# Altium PCB PCB1.PcbDoc
Units mil, origin at the board's own origin, x right, y up, seen from the top; angles counter-clockwise.
Board outline 4439.14 x 4603.27 mil, 2 copper layers (Top Layer, Bottom Layer); 96 components, 122 nets, 402 pads, 72 vias.
Unrouted connection lines stored in the file: 1.
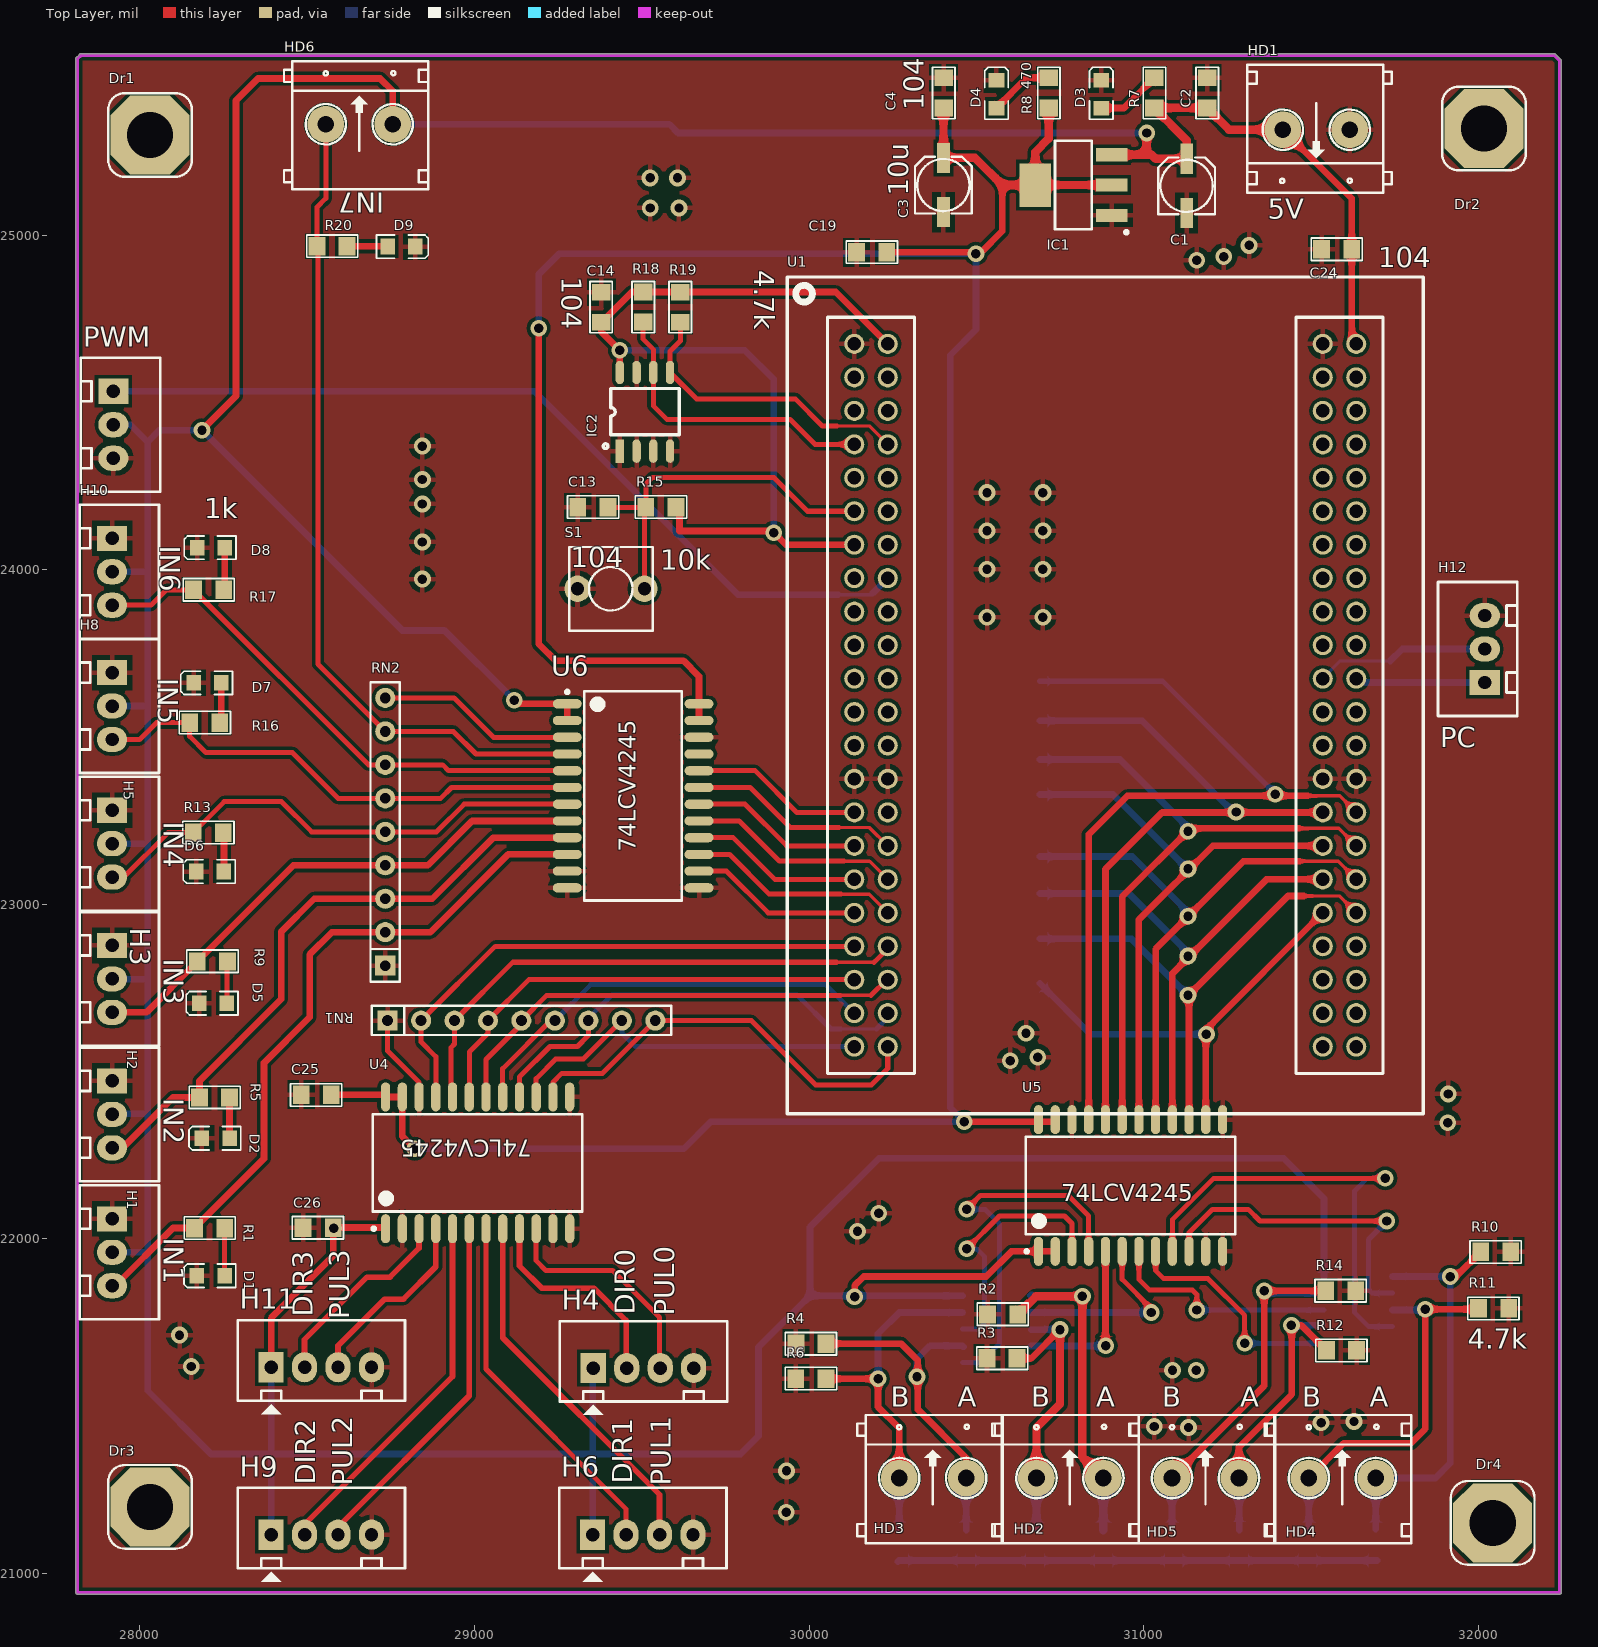
[diagram p0: Top Layer view]
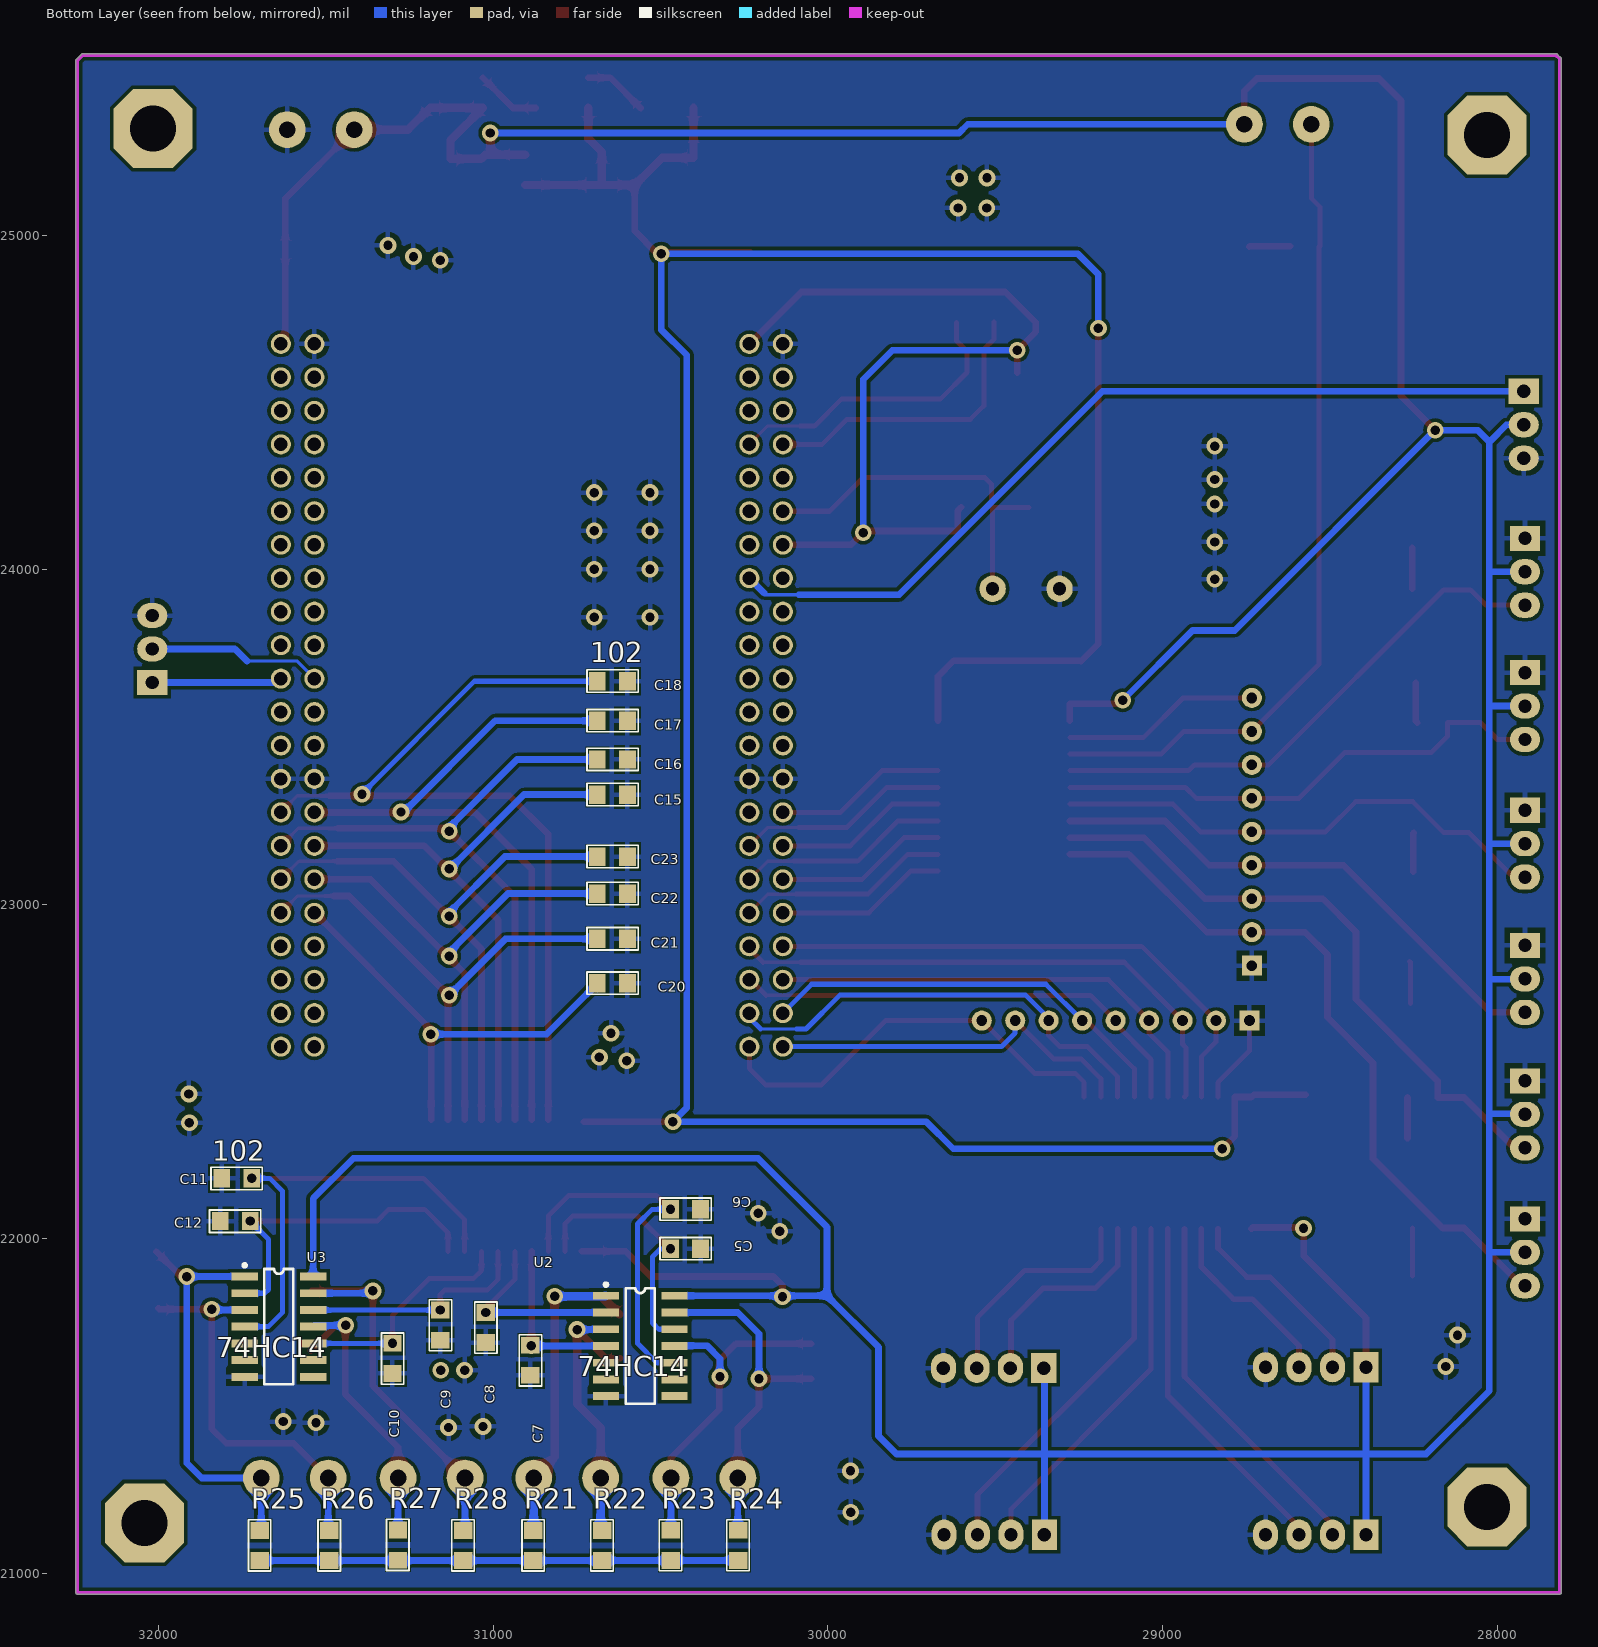
[diagram p1: Bottom Layer view, seen from below]
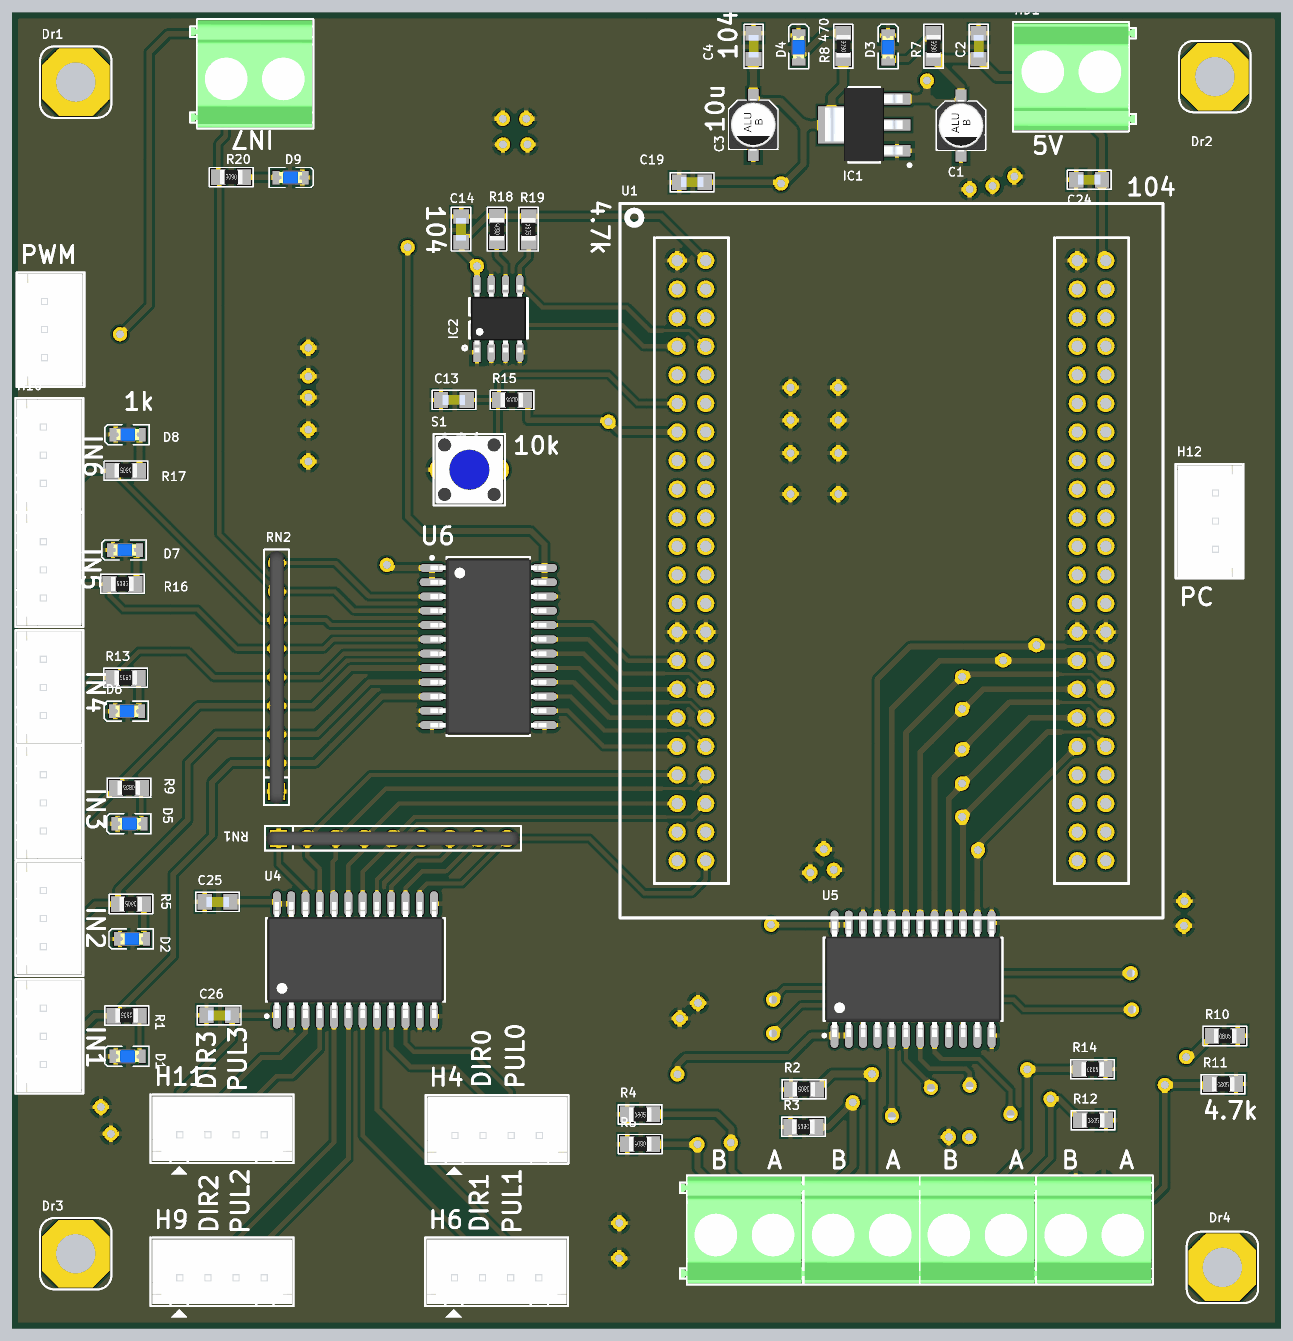
[diagram p2: 3D render of the assembled board from above, using the file's embedded part models]
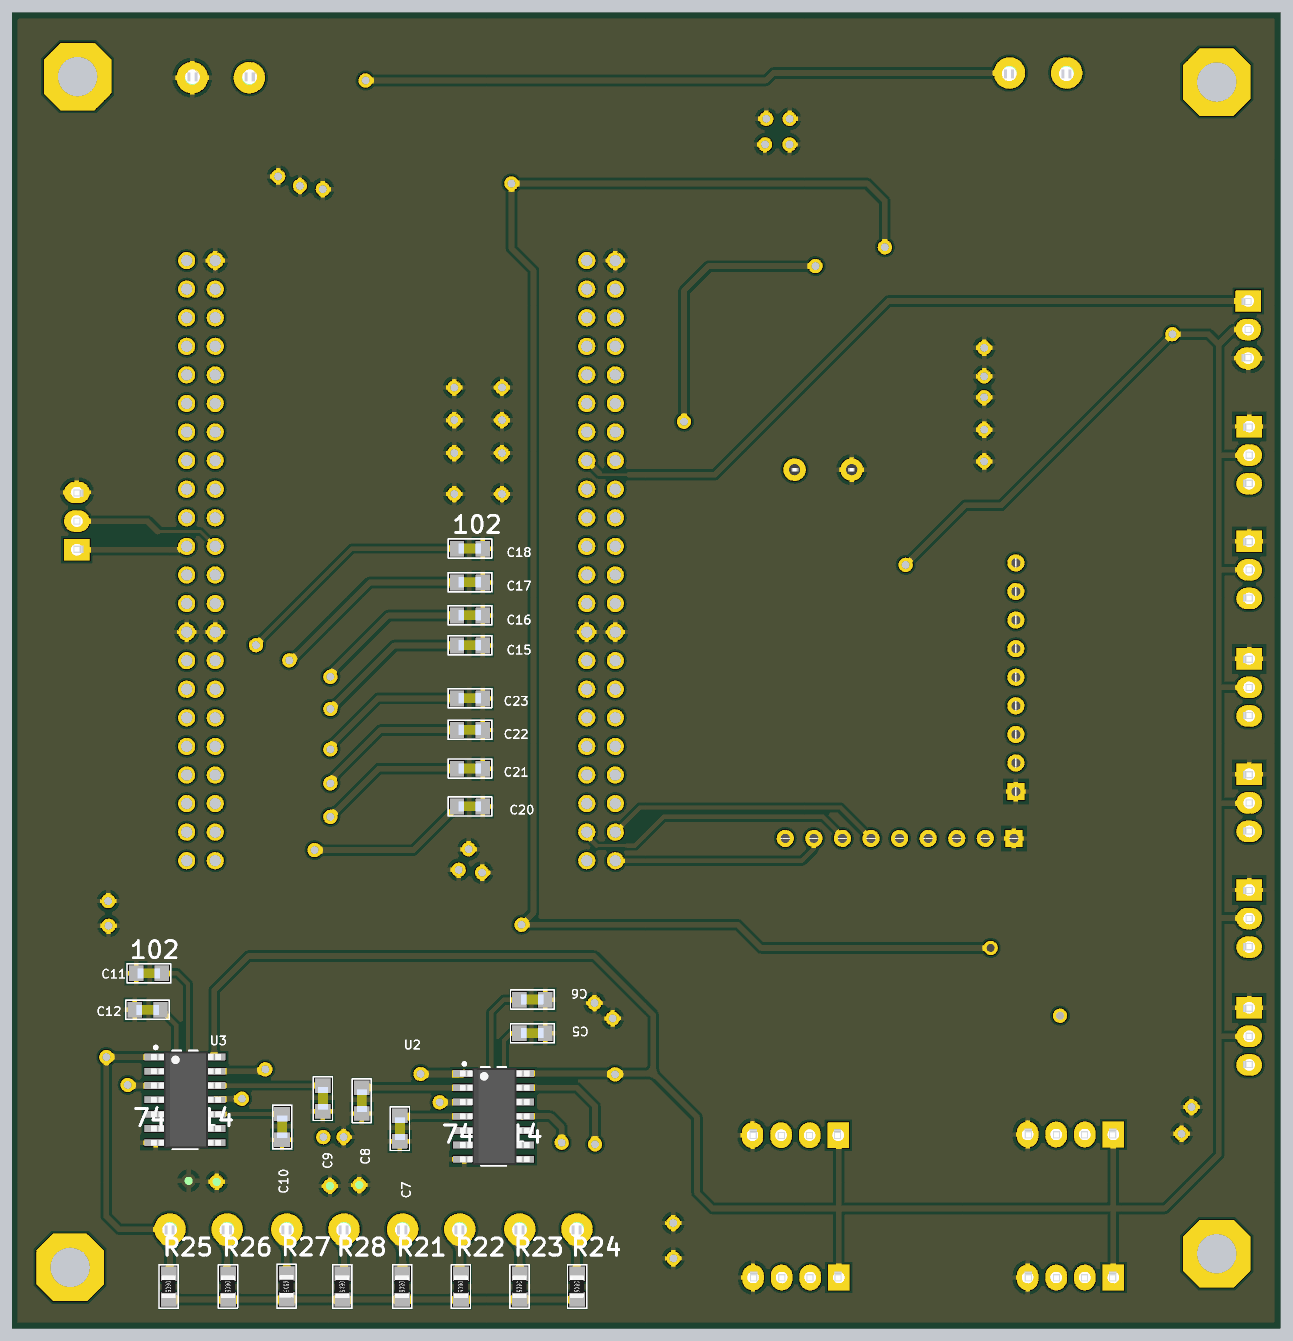
[diagram p3: 3D render of the assembled board from below, using the file's embedded part models]

## Layer stack, top to bottom
Top Solder: solder mask 0.4, Solder Resist, Dk 3.5
Top Layer: signal copper 1.4
Dielectric 1: dielectric 12.6, FR-4, Dk 4.8
Bottom Layer: signal copper 1.4
Bottom Solder: solder mask 0.4, Solder Resist, Dk 3.5

## Board outline
27808.47,20943.47 27808.47,25526.68 cw(c27813.48,25526.68) 27809.95,25530.24 27809.94,25530.22 27819.39,25539.67 27819.37,25539.66 cw(c27822.93,25536.13) 27819.69,25539.95 cw(c27823.52,25536.71) 27823.52,25541.72 32226.99,25541.72 cw(c32226.99,25536.71) 32230.55,25540.24 32230.53,25540.26 32246.14,25524.65 32246.12,25524.67 cw(c32242.59,25521.11) 32247.6,25521.11 32247.6,20943.47 cw(c32242.59,20943.47) 32242.59,20938.45 27813.48,20938.45 cw(c27813.48,20943.47)

## Design rules (kind name [scope] priority, off if disabled: settings)
Clearance Clearance_1 [All] p1: gap=10
Clearance [All] p2: gap=20
PolygonConnect [All] p1: connectstyle=Relief reliefconductorwidth=15 reliefentries=4 polygonreliefangle="90 Angle" airgapwidth=15
RoutingVias [All] p1: holewidth=28 width=50 viastyle="Through Hole" minholewidth=28 minwidth=50 maxholewidth=28 maxwidth=50
SolderMaskExpansion [All] p1: expansion=4
Width [All] p1: maxlimit=100 minlimit=10 preferedwidth=10
30 further rules are at their usual default settings.

## Components (designator, comment, footprint, x,y, rotation, side; value= is the part's Value field where it differs from the comment)
C1 "10uF/16V" CAP_ALU_B 31127.96,25228.01 r270 top
C2 "104" CAP-SM-0805 31189.22,25380.05 r90 top
C3 "10uF/16V" CAP_ALU_B 30401.23,25230.54 r270 top
C4 "104" CAP-SM-0805 30401.64,25380.05 r90 top
C5 "102" CAP-SM-0805 30380.59,21970.63 r0 bottom
C6 "102" CAP-SM-0805 30380.59,22088.54 r0 bottom
C7 "102" CAP-SM-0805 30889.11,21592.63 r90 bottom
C8 "102" CAP-SM-0805 31022.66,21690.44 r90 bottom
C9 "102" CAP-SM-0805 31158.54,21697.66 r90 bottom
C10 "102" CAP-SM-0805 31301.31,21598.26 r90 bottom
C11 "102" CAP-SM-0805 31811.73,22181.15 r180 bottom
C12 "102" CAP-SM-0805 31816.25,22053.59 r180 bottom
C13 "104" CAP-SM-0805 29398.59,24186.56 r180 top
C14 "104" CAP-SM-0805 29379.05,24829.12 r270 top
C15 "102" CAP-SM-0805 30598.97,23328.05 r0 bottom
C16 "102" CAP-SM-0805 30598.97,23432.89 r0 bottom
C17 "102" CAP-SM-0805 30598.97,23548.5 r0 bottom
C18 "102" CAP-SM-0805 30598.97,23666.7 r0 bottom
C19 "104" CAP-SM-0805 30231.81,24948.38 r180 top
C20 "102" CAP-SM-0805 30598.97,22764.06 r0 bottom
C21 "102" CAP-SM-0805 30598.97,22896.72 r0 bottom
C22 "102" CAP-SM-0805 30598.97,23032.13 r0 bottom
C23 "102" CAP-SM-0805 30598.97,23142.68 r0 bottom
C24 "104" CAP-SM-0805 31621.29,24957.11 r180 top
C25 "104" CAP-SM-0805 28482.01,22431.1 r0 top
C26 "104" CAP-SM-0805 28487.62,22034 r0 top
D1 "LED" LED_0805_Blue 28211.66,21890.12 r180 top
D2 "LED" LED_0805_Blue 28226.82,22301.08 r180 top
D3 "LED" LED_0805_Blue 30872.83,25421.05 r90 top
D4 "LED" LED_0805_Blue 30559.72,25421.05 r90 top
D5 "LED" LED_0805_Blue 28218.27,22704.36 r180 top
D6 "LED" LED_0805_Blue 28209.82,23097.97 r180 top
D7 "LED" LED_0805_Blue 28201.88,23661.91 r180 top
D8 "LED" LED_0805_Blue 28212.16,24065.82 r180 top
D9 "LED" LED_0805_Blue 28782,24965.4 r0 top
Dr1 "Drill" "Drill 3mm" 28030.44,25299.19 r0 top
Dr2 "Drill" "Drill 3mm" 32016.5,25318.47 r0 top
Dr3 "Drill" "Drill 3mm" 28030.44,21199.47 r0 top
Dr4 "Drill" "Drill 3mm" 32042.7,21151.63 r0 top
H1 "IN 1" "Header White 3" 27916.9,22060.17 r270 top
H2 "IN 2" "Header White 3" 27916.9,22472.35 r270 top
H3 "IN 3" "Header White 3" 27916.9,22877.19 r270 top
H4 "H4" "Header White 4" 29354.89,21614.24 r0 top
H5 "IN 4" "Header White 3" 27916.9,23281.29 r270 top
H6 "H4" "Header White 4" 29353,21116.27 r0 top
H8 "IN 5" "Header White 3" 27916.9,23692.46 r270 top
H9 "H4" "Header White 4" 28392.18,21116.27 r0 top
H10 "IN 6" "Header White 3" 27916.9,24093.84 r270 top
H11 "H4" "Header White 4" 28392.18,21616.71 r0 top
H12 "PC" "Header White 3" 32019.08,23663.06 r90 top
HD1 "5V IN" "Domino 2" 31615.52,25314.85 r180 top
HD2 "ENC 1" "Domino 2" 30679.25,21285.58 r0 top
HD3 "ENC 2" "Domino 2" 30269.11,21285.58 r0 top
HD4 "ENC 3" "Domino 2" 31493.31,21285.58 r0 top
HD5 "ENC 4" "Domino 2" 31084.31,21285.58 r0 top
HD6 "IN 7" "Domino 2" 28555.53,25331.11 r0 top
IC1 "LM1117-3V3" SOT223-4N 30789.92,25149.51 r180 top
IC2 "24Cxx" SOIC8 29434.28,24354.41 r90 top
PWM "PWM" "Header White 3" 27920.61,24533.22 r270 top (schematic designator H7)
R1 "1k" RES-SM-0805 28253.45,22032.52 r180 top
R2 "4.7k" RES-SM-0805 30623.15,21774.42 r180 top
R3 "4.7k" RES-SM-0805 30621.44,21643.19 r180 top
R4 "4.7k" RES-SM-0805 29960.63,21687.28 r0 top
R5 "1k" RES-SM-0805 28268.05,22422.66 r180 top
R6 "4.7k" RES-SM-0805 30050.02,21582.77 r180 top
R7 "470" RES-SM-0805 31031.36,25380.05 r90 top
R8 "470" RES-SM-0805 30715.82,25380.05 r90 top
R9 "10k" RES-SM-0805 28261.52,22829.31 r180 top
R10 "4.7k" RES-SM-0805 32006.89,21961.92 r0 top
R11 "4.7k" RES-SM-0805 32000.28,21793.03 r0 top
R12 "4.7k" RES-SM-0805 31545.78,21666.87 r0 top
R13 "1k" RES-SM-0805 28249.48,23214.39 r180 top
R14 "4.7k" RES-SM-0805 31543.61,21845.87 r0 top
R15 "10k" RES-SM-0805 29601.77,24186.56 r180 top
R16 "1k" RES-SM-0805 28238.6,23542.94 r180 top
R17 "1k" RES-SM-0805 28250.35,23939.51 r180 top
R18 "4.7k" RES-SM-0805 29503.8,24740.12 r90 top
R19 "4.7k" RES-SM-0805 29615.21,24829.12 r270 top
R20 "1k" RES-SM-0805 28619.19,24966.46 r180 top
R21 "4.7k" RES-SM-0805 30880.29,21129.02 r270 bottom
R22 "4.7k" RES-SM-0805 30674.56,21129.02 r270 bottom
R23 "4.7k" RES-SM-0805 30469.61,21129.32 r270 bottom
R24 "4.7k" RES-SM-0805 30268.13,21129.32 r270 bottom
R25 "4.7k" RES-SM-0805 31697.66,21129.02 r270 bottom
R26 "4.7k" RES-SM-0805 31489.71,21129.02 r270 bottom
R27 "4.7k" RES-SM-0805 31284.87,21130.03 r270 bottom
R28 "4.7k" RES-SM-0805 31089.85,21129.02 r270 bottom
RN1 "10K" RN8 28740.23,22652.73 r0 top
RN2 "10K" RN8 28733.24,22816.77 r90 top
S1 "Reset" SW2 29307.73,23943.03 r0 top
U1 "STM_CPLD_Board" STM_CPLD_Board 30134.84,24674.72 r0 top
U2 "74HC14" SO14-150mil 30560.86,21680.25 r270 bottom
U3 "74HC14" SO14-150mil 31640.8,21737.86 r270 bottom
U4 "74LCV4245" "SOIC24 - wide" 29009.3,22227.58 r90 top
U5 "74LCV4245" "SOIC24 - wide" 30960.38,22159.76 r90 top
U6 "74LCV4245" "SOIC24 - wide" 29474.05,23324.29 r0 top

## Footprints (in the part's own frame and the unit in brackets; to place one, negate y for a bottom-side part, rotate by r counter-clockwise, add the part's x,y. Pads: shape width x height; smd on the part's side, far side on the other; paste and mask are expansions set on the pad)
CAP-SM-0805 [mil]
  rect 50x55 smd: 1(0,0) 2(90,0)
  silkscreen extent -32,-34 121,33, body extent 6,-18 84,17, height 47
CAP_ALU_B [mil] "10uF -> 22uF"
  rect 90x38 smd: 1(0,0) 2(162,0)
  silkscreen extent -4,-85 166,85, body extent -10,-85 172,85, height 213
"Domino 2" [mil] "Domino 2, 2 pin, hight 300mil, Pin to Pin 200, Colour Green"
  round 110 hole 50: 1(0,0) 2(200,0)
  silkscreen extent -125,-194 306,189, body extent -121,-190 301,184, height 591
"Drill 3mm" [mm]
  oct 6x6 hole 3.5: 1(0,0)
  silkscreen extent -3.17,-3.17 3.17,3.17
"Header White 3" [mil] "JST Connector"
  rect 75x90 hole 40: 1(0,0)
  oval 75x90 hole 40: 2(100,0) 3(200,0)
  silkscreen extent -100,-97 300,140, body extent -95,-93 295,134, height 276
"Header White 4" [mil] "JST Connector"
  rect 75x90 hole 40: 1(0,0)
  oval 75x90 hole 40: 2(100,0) 3(200,0) 4(300,0)
  silkscreen extent -100,-140 400,140, body extent -94,-94 394,133, height 276
LED_0805_Blue [mm] "Chip LED, 2-Leads, Body 2.0x1.3mm, IPC Medium Density"
  rect 1.1x1.2 smd: 1(-1.05,0) 2(1.05,0)
  silkscreen extent -1.91,-0.89 2.03,0.89, body extent -1.01,-0.62 1.01,0.63, height 1.1
RES-SM-0805 [mil]
  rect 50x55 smd: 1(0,0) 2(90,0)
  silkscreen extent -32,-34 121,33, body extent 6,-25 84,24, height 10
RN8 [mil] "R SIP8, 9 Pin"
  rect 60x60 hole 32: 1(0,0)
  round 60 hole 32: 2(100,0) 3(200,0) 4(300,0) 5(400,0) 6(500,0) 7(600,0) 8(700,0) 9(800,0)
  silkscreen extent -48,-43 847,44, body extent -43,-25 843,24, height 219
SO14-150mil [mm] "Small Outline; 14 Leads; Body Width 3.9 mm; Pitch 1.27 mm"
  rect 0.6x2 smd: 1(-3.81,-2.6) 2(-2.54,-2.6) 3(-1.27,-2.6) 4(0,-2.6) 5(1.27,-2.6) 6(2.54,-2.6) 7(3.81,-2.6) 8(3.81,2.6) 9(2.54,2.6) 10(1.27,2.6) 11(0,2.6) 12(-1.27,2.6) 13(-2.54,2.6) 14(-3.81,2.6)
  silkscreen extent -4.78,-2.72 4.38,1.1, body extent -4.32,-3 4.32,3.2, height 1.7
SOIC8 [mil]
  rect 70x25 smd: 1(0,0)
  oval 70x25 smd: 2(0,-50) 3(0,-100) 4(0,-150) 5(235,-150) 6(235,-100) 7(235,-50) 8(235,0)
  silkscreen extent 8,-178 187,50, body extent -1,-171 235,21, height 69
"SOIC24 - wide" [mm] "SOIC, 24-Leads, Body 15.4x7.5mm, Pitch 1.27mm, IPC Low Density"
  oval 2.2x0.7 smd: 1(-5,6.985) 2(-5,5.715) 3(-5,4.445) 4(-5,3.175) 5(-5,1.905) 6(-5,0.635) 7(-5,-0.635) 8(-5,-1.905) 9(-5,-3.175) 10(-5,-4.445) 11(-5,-5.715) 12(-5,-6.985) 13(5,-6.985) 14(5,-5.715) 15(5,-4.445) 16(5,-3.175) 17(5,-1.905) 18(5,-0.635) 19(5,0.635) 20(5,1.905) 21(5,3.175) 22(5,4.445) 23(5,5.715) 24(5,6.985)
  silkscreen extent -5.12,-7.95 3.7,8.01, body extent -5.15,-7.8 5.15,7.8, height 2.65
SOT223-4N [mm] "SOT223, 4-Leads, Body 6.5x3.5mm, Pitch 2.3mm, Lead Span 7mm, IPC Medium Density"
  rect 2.4x1 smd: 1(-2.9,2.3) 2(-2.9,0) 3(-2.9,-2.3)
  rect 2.4x3.3 smd: 4(2.9,0)
  silkscreen extent -4.14,-3.35 1.4,3.71, body extent -3.39,-3.27 3.5,3.23, height 1.72
STM_CPLD_Board [mil] "Stm32f4 and Max2 520 on one board"
  round 60 hole 40: 1(0,0) 2(0,-100) 3(0,-200) 4(0,-300) 5(0,-400) 6(0,-500) 7(0,-600) 8(0,-700) 9(0,-800) 10(0,-900) 11(0,-1000) 12(0,-1100) 13(0,-1200) 14(0,-1300) 15(0,-1400) 16(0,-1500) 17(0,-1600) 18(0,-1700) 19(0,-1800) 20(0,-1900) 21(0,-2000) 22(0,-2100) 23(100,-2100) 24(100,-2000) 25(100,-1900) 26(100,-1800) 27(100,-1700) 28(100,-1600) 29(100,-1500) 30(100,-1400) 31(100,-1300) 32(100,-1200) 33(100,-1100) 34(100,-1000) 35(100,-900) 36(100,-800) 37(100,-700) 38(100,-600) 39(100,-500) 40(100,-400) 41(100,-300) 42(100,-200) 43(100,-100) 44(100,0) 45(1400,0) 46(1400,-100) 47(1400,-200) 48(1400,-300) 49(1400,-400) 50(1400,-500) 51(1400,-600) 52(1400,-700) 53(1400,-800) 54(1400,-900) 55(1400,-1000) 56(1400,-1100) 57(1400,-1200) 58(1400,-1300) 59(1400,-1400) 60(1400,-1500) 61(1400,-1600) 62(1400,-1700) 63(1400,-1800) 64(1400,-1900) 65(1400,-2000) 66(1400,-2100) 67(1500,-2100) 68(1500,-2000) 69(1500,-1900) 70(1500,-1800) 71(1500,-1700) 72(1500,-1600) 73(1500,-1500) 74(1500,-1400) 75(1500,-1300) 76(1500,-1200) 77(1500,-1100) 78(1500,-1000) 79(1500,-900) 80(1500,-800) 81(1500,-700) 82(1500,-600) 83(1500,-500) 84(1500,-400) 85(1500,-300) 86(1500,-200) 87(1500,-100) 88(1500,0)
  silkscreen extent -200,-2300 1700,200
SW2 [mm] "SW button 2pin, 250x 250 mil"
  round 2 hole 1: 1(0,0) 2(5.08,0)
  silkscreen extent -0.64,-3.17 5.71,3.17, body extent -0.51,-3.05 5.59,3.05, height 4.2

## Part data
C1 C3: library part CP2, "C 47uF/50V , 220uF/16V"
C2 C4 C5 C6 C7 C8 C9 C10 C11 C12 C13 C14 C15 C16 C17 C18 C19 C20 C21 C22 C23 C24 C25 C26: library part CAP_SM_0805, "Ceramic Capacitor SMD"
D1 D2 D3 D4 D5 D6 D7 D8 D9: library part LED_SMD, "LED SMD"
Dr1 Dr2 Dr3 Dr4: library part "Drill 3mm", "Drill 3mm"
H1 H2 H3 H5 H8 H10 H12 PWM: library part "Header white 3", "Connector 3"
H4 H6 H9 H11: library part "Header white 4", "Header white 4"
HD1 HD2 HD3 HD4 HD5 HD6: library part "Domino 2", "Domino 2 200mil"
IC1: library part LM1117, "Available in 1.8V, 2.5V, 2.85V, 3.3V, 5V, and  Adjustable Versions"
IC2: "Standard 2-Wire Bus Interface Serial EEPROM"
R1 R2 R3 R4 R5 R6 R7 R8 R9 R10 R11 R12 R13 R14 R15 R16 R17 R18 R19 R20 R21 R22 R23 R24 R25 R26 R27 R28: library part Res-SMD, "Resistor"
RN1 RN2: library part RN8, "Resistor 8 (Thanh)"
S1: library part "SW - 2Pin", "Switch button 2 pin"
U1: "STM32f4 and Max2 570 on one board"
U2 U3: "Hex Inverters With SCHMITT-TRIGGER Inputs"
U4 U5 U6: "Octal dual supply translating transceiver; 3-state"

## Via types
v1: diameter 50, hole 28, Top Layer to Bottom Layer, 72 vias

## Nets (pads, with @x,y where several pads share a name; then routed paths per layer and width w, separated by ;. In a path a pad name is that pad's centre, name@x,y a point inside that pad or via, vN(x,y) a via of type N, cw(c..) or ccw(c..) an arc to the next point about the centre after c; other vN are vias at no path point)
3V3: C3.1 C4.1 C19.1 C25.2 IC1.2 IC1.4 R8.1 U4.23 U4.24 U5.23 U5.24 U6.23 U6.24 | length 9500.2
  Top Layer w20: C25.2 28727.63,22431.1 U4.24 U4.23 28784.3,22306.77 v1(28821.57,22269.5) ; v1(29191.74,24721.42) 29191.74,23778.64 29243.04,23727.35 29243.04,23728.23 29623.95,23728.23 29670.9,23681.28 U6.24 U6.23 ; C19.1 30513.6,24948.38 30577,25011.78 30577,25149.51 ; v1(30463.21,22350.7) U5.23@30729.47,22350.7
  Top Layer w25: C4.1 30401.64,25230.95 30495.56,25230.95 30577,25149.51 IC1.4 ; R8.1 30715.82,25288.28 30675.75,25248.21 IC1.4 ; IC1.2 IC1.4
  Bottom Layer w20: v1(28821.57,22269.5) 29625.54,22269.5 29706.74,22350.7 v1(30463.21,22350.7) 30421.53,22392.38 30421.53,24641.02 30498.39,24717.87 v1(30498.39,24944.4) 29253.74,24944.4 29191.74,24882.4 v1(29191.74,24721.42)
3V3_BOARD: C14.2 IC2.8 R15.1 R18.2 R19.1 U1.7 U1.44 | length 2687.5
  Top Layer w20: IC2.8 v1(29434.28,24655.47) 29379.05,24710.69 C14.2 29470.05,24830.12 R18.2 30079.44,24830.12 U1.44@30231.81,24677.75 ; R15.1 29612.41,24175.92 29612.41,24115.94 v1@29889.35,24115.94 ; v1(29894.48,24110.82) 29930.58,24074.72 U1.7
  Bottom Layer w20: v1(29434.28,24655.47) 29807.67,24655.47 29894.48,24568.66 v1(29894.48,24110.82)
5V: C1.1 C2.1 C24.1 C26.2 H1.2 H2.2 H3.2 H4.1 H5.2 H6.1 H8.2 H9.1 H10.2 H11.1 HD1.2 HD6.2 IC1.3 PWM.2 R7.1 R21.2 R22.2 R23.2 R24.2 R25.2 R26.2 R27.2 R28.2 U1.88 U2.14 U3.14 U4.1 U5.1 U5.2 U6.1 U6.2 | length 19509.8
  Top Layer w20: v1(28185.47,24417.09) 28287.26,24518.88 28287.26,25402.33 28352.98,25468.06 28717.85,25468.06 28755.53,25430.37 HD6.2 ; H11.1 28392.18,21763.51 28577.62,21948.95 C26.2 28731.03,22034 U4.1 ; v1(29118.9,23609.92) 29129.53,23599.29 U6.1 U6.2 ; v1(30135.82,21827.06) 30135.82,21860.57 30163.19,21887.94 30529.27,21887.94 30604.24,21962.91 U5.1 U5.2 ; HD1.2 31621.29,25109.08 C24.1 31621.29,24688.27 U1.88
  Top Layer w25: IC1.3 31008.74,25240.06 ; v1(31008.74,25304.88) 31008.74,25240.06 ; HD1.2 31254.43,25314.85 C2.1 R7.1 31127.96,25283.45 C1.1 31035.73,25228.01 31023.68,25240.06 31008.74,25240.06
  Bottom Layer w20: H1.2 28023.31,21960.17 ; H5.2 28020.89,23181.29 ; H8.2 28021.16,23592.46 ; H10.2 28019.49,23993.84 ; H3.2@27917.95,22776.13 28023.5,22776.13 ; H2.2@27918.67,22374.12 28023.5,22374.12 ; PWM.2 27972.05,24433.22 28023.5,24381.76 ; H9.1 28392.18,21357.71 ; H11.1 28392.18,21357.71 ; HD6.2 29582.26,25331.11 29608.49,25304.88 v1(31008.74,25304.88) ; v1(29118.9,23609.92) 28910.5,23818.32 28784.23,23818.32 v1(28185.47,24417.09) 28058.82,24417.09 28023.5,24381.76 ; H6.1 29353,21357.71 ; H4.1@29353,21616.71 29353,21357.71 ; R24.2@30264.62,21035.8 R24.2 R23.2 R22.2@30674.26,21039.32 ; U2.14 30002.5,21830.25 ; R22.2 R21.2 R28.2 R26.2 R25.2 ; U3.14 31538.43,22120.64 31417.8,22241.27 30208.53,22241.27 30002.5,22035.25 30002.5,21830.25 ; 28023.5,22374.12 28023.5,22776.13 ; 28023.5,22374.12 28023.5,21546.59 28212.38,21357.71 28392.18,21357.71 ; 28023.5,22776.13 28023.5,24381.76 ; 28392.18,21357.71 29353,21357.71 ; 29353,21357.71 29795.17,21357.71 29848.9,21411.44 29848.9,21676.65 30002.5,21830.25
  other v1: 28578.81,22032.34
DIR_0: RN1.8 U1.22 U4.15 | length 1131.2
  Top Layer w15: U4.15 29184.3,22479.22 29242.7,22537.62 29325.13,22537.62 RN1.8
  Bottom Layer w15: RN1.8 29440.23,22615.73 29481.25,22574.72 U1.22
DIR_1: RN1.6 U1.21 U4.17 | length 1275.3
  Top Layer w15: U4.17 29084.3,22508.85 29228.17,22652.73 RN1.6
  Bottom Layer w15: RN1.6 29348.71,22761.21 30048.35,22761.21 U1.21
DIR_2: RN1.4 U1.20 U4.19 | length 1396.6
  Top Layer w15: U4.19 28984.3,22558.8 29040.23,22614.73 RN1.4 29162.22,22774.72 U1.20
DIR_3: RN1.2 U1.19 U4.21 | length 1633.1
  Top Layer w15: U4.21 28884.3,22544.86 28840.23,22588.93 RN1.2 29062.22,22874.72 U1.19
EEP_SCL: IC2.6 R18.1 U1.4 | length 911.2
  Top Layer w15: R18.1 29503.8,24689.01 29534.28,24658.54 IC2.6 29534.28,24489.71 29574.67,24449.32 29942.74,24449.32 30017.34,24374.72 U1.4
EEP_SDA: IC2.5 R19.2 U1.41 | length 902
  Top Layer w10: 30083.91,24429.67 30179.89,24429.67 U1.41
  Top Layer w15: R19.2 29615.21,24683.43 29584.28,24652.49 IC2.5 29663.24,24510.44 29958.75,24510.44 30039.52,24429.67 30083.91,24429.67
ENC_A0: C15.2 U1.60 U5.18 | length 1787.9
  Top Layer w20: U5.18 30985.38,22954.18 31205.92,23174.72 U1.60
  Bottom Layer w20: C15.2 30907.99,23328.05 31130.18,23105.85 v1@31146.5,23105.85
  other v1: 31131.97,23105.85
ENC_A1: C17.2 U1.59 U5.20 | length 2168.1
  Top Layer w20: U5.20 30885.38,23105.31 31054.79,23274.72 U1.59
  Bottom Layer w20: C17.2 30994.52,23548.5 31267.21,23275.82 v1(31275.81,23275.82)
ENC_A2: C20.2 U1.62 U5.14 | length 1324.1
  Top Layer w20: U5.14 31185.38,22625.25 U1.62
  Bottom Layer w20: C20.2 30841.18,22611.85 v1(31187.19,22611.85)
ENC_A3: C22.2 U1.61 U5.16 | length 1533.7
  Top Layer w20: U5.16 31085.38,22793.12 31366.97,23074.72 U1.61
  Bottom Layer w20: C22.2 30955.78,23032.13 v1@31142.63,22845.29
  other v1: 31131.97,22845.29
ENC_B0: C16.2 U1.73 U5.19 | length 2015.3
  Top Layer w10: 31464.49,23226.98 31582.58,23226.98 U1.73
  Top Layer w20: U5.19 30935.38,23022.54 31139.82,23226.98 31464.49,23226.98
  Bottom Layer w20: C16.2 30928.92,23432.89 v1@31143.6,23218.21
  other v1: 31131.97,23218.21
ENC_B1: C18.2 U1.74 U5.21 | length 2572.4
  Top Layer w10: 31489.96,23324.2 31585.35,23324.2 U1.74
  Top Layer w20: U5.21 30835.38,23208.85 30950.74,23324.2 31489.96,23324.2
  Bottom Layer w15: C18.2 31056.53,23666.7 v1@31399.36,23323.87
  other v1: 31392.49,23329.01
ENC_B2: C21.2 U1.71 U5.15 | length 1528.4
  Top Layer w10: 31477.7,23025.01 31584.55,23025.01 U1.71
  Top Layer w20: U5.15 31135.38,22729.43 31430.95,23025.01 31477.7,23025.01
  Bottom Layer w20: C21.2 30963.34,22896.72 v1(31131.97,22728.08)
ENC_B3: C23.2 U1.72 U5.17 | length 1768.7
  Top Layer w10: 31466.38,23128.83 31580.73,23128.83 U1.72
  Top Layer w20: U5.17 31035.38,22866.19 31298.02,23128.83 31466.38,23128.83
  Bottom Layer w20: C23.2 30965.35,23142.68 v1@31143.6,22964.43
  other v1: 31131.97,22964.43
GND: C1.2 C2.2 C3.2 C4.2 C5.1 C6.1 C7.1 C8.1 C9.1 C10.1 C11.1 C12.1 C13.2 C14.1 C15.1 C16.1 C17.1 C18.1 C19.2 C20.1 C21.1 C22.1 C23.1 C24.2 C25.1 C26.1 D1.2 D2.2 D3.2 D4.2 D5.2 D6.2 D7.2 D8.2 D9.2 H1.1 H2.1 H3.1 H4.4 H5.1 H6.4 H8.1 H9.4 H10.1 H11.4 H12.3 HD1.1 IC1.1 IC2.1 IC2.2 IC2.3 IC2.4 IC2.7 PWM.3 R2.2 R3.2 R4.1 R6.2 R10.2 R11.2 R12.2 R14.2 RN1.1 RN2.1 S1.1 U1.1 U1.14 U1.31 U1.45 U1.58 U1.75 U2.7 U3.7 U4.2 U4.11 U4.12 U4.13 U4.22 U5.11 U5.12 U5.13 U5.22 U6.11 U6.12 U6.13 U6.22 | length 267.3
  Top Layer w15: RN1.1 28740.23,22562.2 28834.3,22468.13 U4.22
  other v1: 29931.73,21183.28 29932.39,21306.84 31133.66,21436.63 31030.91,21439.74 31529.84,21451.07 31628.03,21454.5 31085.69,21607.89 28153.5,21618.92 28118.47,21712.8 30144.28,22022.82 30207.82,22076.7 31908.09,22347.01 31909.52,22433.38 30601.04,22532.94 30682.85,22542.82 30648.05,22615 30531.58,23857.75 30698.49,23857.75 28844.22,23971.9 30531.58,24001.02 30698.49,24001.02 28844.22,24082.93 30531.58,24116.47 30698.49,24116.47 28844.22,24196.48 30531.58,24230.53 30698.49,24230.53 28844.22,24269.53 28844.22,24369.46 31158.4,24924.45 31238.6,24935.77 31314.75,24969.13 29525.51,25081.02 29611.01,25081.02 29524.64,25170.84 29606.69,25170.84
H_DIR_0: H4.2 U4.9 | length 637.9
  Top Layer w17: U4.9 29134.3,21919.52 29200.76,21853.05 29356.57,21853.05 29453,21756.62 H4.2@29453,21616.13
H_DIR_1: H6.2 U4.7 | length 1087.9
  Top Layer w15: U4.7 29034.3,21611.31 29453,21192.61 H6.2
H_DIR_2: H9.2 U4.5 | length 1097.6
  Top Layer w17: H9.2 28492.18,21146.84 28934.3,21588.96 U4.5
H_DIR_3: H11.2 U4.3 | length 595.9
  Top Layer w17: H11.2 28492.18,21699.13 28678.99,21885.94 28747.54,21885.94 28834.3,21972.69 U4.3
H_ENC_A0: HD2.2 R2.1 R21.1 U2.1 | length 1094.8
  Top Layer w25: R2.1 30677.28,21828.55 v1(30816.53,21828.55) 30816.53,21348.29 HD2.2
  Bottom Layer w25: U2.1@30663.86,21830.89 30665.49,21829.26 30666.57,21830.34 30668.37,21828.55 v1(30816.53,21828.55) ; R21.1@30879.25,21130.07 HD2.2
H_ENC_A1: HD3.2 R4.2 R23.1 U2.11 | length 1070.4
  Top Layer w20: R4.2 30274.18,21687.28 30324.85,21636.61 30324.85,21490.55 30469.11,21346.3 HD3.2
  Bottom Layer w20: v1(30322.46,21587.91) 30322.46,21642.04 30361.62,21681.2 30457.55,21681.2 U2.11 ; U2.11@30459.87,21678.88 U2.11@30461.15,21677.6 ; R23.1@30469.11,21129.82 HD3.2
H_ENC_A2: HD4.2 R10.1 R25.1 U3.1 | length 1244.9
  Top Layer w20: v1(31915.96,21887.54) 31932.51,21887.54 R10.1
  Bottom Layer w20: R25.1@31693.31,21133.37 HD4.2 31871.26,21285.58 31915.96,21330.28 v1(31915.96,21887.54) ; U3.1 v1@31915.65,21887.86
H_ENC_A3: HD5.2 R12.1 R27.1 U3.11 | length 901.2
  Top Layer w20: HD5.2 31284.31,21377.67 31442.18,21535.54 v1@31442.18,21737.48 ; v1(31441.2,21741.83) 31470.82,21741.83 R12.1
  Bottom Layer w20: R27.1 HD5.2@31284.87,21285.03 ; v1(31441.2,21741.83) U3.11@31534.46,21741.83
H_ENC_B0: HD2.1 R3.1 R22.1 U2.3 | length 873.6
  Top Layer w20: R3.1 30663.6,21643.19 v1(30749.57,21729.15)
  Top Layer w25: HD2.1 30679.25,21436.05 30749.57,21506.37 v1(30749.57,21729.15)
  Bottom Layer w20: U2.3@30664.32,21729.15 v1(30749.57,21729.15)
  Bottom Layer w25: R22.1@30679.25,21133.71 HD2.1
H_ENC_B1: HD3.1 R6.1 R24.1 U2.13 | length 1046.9
  Top Layer w20: R6.1@30050.51,21582.28 v1(30205.99,21582.28) 30205.99,21498.16 30269.11,21435.04 HD3.1
  Bottom Layer w20: v1(30205.99,21582.28) 30205.99,21716.73 30269.51,21780.25 U2.13 ; R24.1@30269.11,21130.29 HD3.1
H_ENC_B2: HD4.1 R11.1 R26.1 U3.3 | length 1175.5
  Top Layer w20: HD4.1 31597.15,21389.42 31798.14,21389.42 31841.26,21432.54 v1(31841.26,21790.06) 31997.31,21790.06 R11.1
  Bottom Layer w20: R26.1@31493.31,21132.62 HD4.1 ; U3.3 v1@31839.06,21787.86
H_ENC_B3: HD5.1 R14.1 R28.1 U3.13 | length 1188.8
  Top Layer w20: HD5.1 31359.79,21561.06 v1(31359.79,21844.87) R14.1@31542.61,21844.87
  Bottom Layer w20: R28.1@31084.31,21134.55 HD5.1 ; v1(31359.79,21844.87) 31366.8,21837.86 U3.13
H_PWM_0: H4.3 U4.10 | length 684.1
  Top Layer w15: U4.10 29184.3,21934.96 29213.23,21906.03 29412.66,21906.03 29553,21765.68 H4.3@29553,21616.13
H_PWM_1: H6.3 U4.8 | length 1108.6
  Top Layer w17: U4.8 29084.3,21704.65 29553,21235.95 H6.3
H_PWM_2: H9.3 U4.6 | length 1076.9
  Top Layer w17: H9.3 28592.18,21139.23 28984.3,21531.35 U4.6
H_PWM_3: H11.3 U4.4 | length 567.9
  Top Layer w17: H11.3 28592.18,21680.72 28731.73,21820.27 28787.82,21820.27 28884.3,21916.75 U4.4
IN_0: U1.18 U6.14 | length 515.5
  Top Layer w15: U6.14 29753.2,23099.29 29877.77,22974.72 U1.18
IN_1: U1.27 U6.15 | length 636.3
  Top Layer w10: 30094.7,23030.4 30115.52,23030.4 30116.2,23029.72 30179.84,23029.72 U1.27
  Top Layer w15: U6.15 29761.74,23149.29 29880.63,23030.4 30094.7,23030.4
IN_2: U1.17 U6.16 | length 515.5
  Top Layer w15: U6.16 29772.9,23199.29 29897.47,23074.72 U1.17
IN_3: U1.28 U6.17 | length 636.3
  Top Layer w10: 30103.44,23129.13 30180.43,23129.13 U1.28
  Top Layer w15: U6.17 29791.05,23249.29 29911.21,23129.13 30103.44,23129.13
IN_4: U1.16 U6.18 | length 515.5
  Top Layer w15: U6.18 29808.33,23299.29 29932.91,23174.72 U1.16
IN_5: U1.29 U6.19 | length 636.3
  Top Layer w10: 30088.59,23229.62 30179.93,23229.62 U1.29
  Top Layer w15: U6.19 29823.89,23349.29 29943.55,23229.62 30088.59,23229.62
IN_6: U1.15 U6.20 | length 515.5
  Top Layer w15: U6.20 29838.54,23399.29 29963.12,23274.72 U1.15
IN_7: U1.30
IN_EN_A0: C8.2 U2.2 U5.6 | length 578
  Top Layer w15: U5.6 30935.38,21879.22 31022.47,21792.13 v1(31022.47,21780.25)
  Bottom Layer w20: U2.2 v1(31022.47,21780.25)
IN_EN_A1: C6.2 U2.10 U5.4 | length 1120.9
  Top Layer w15: v1(30470.59,22088.54) 30511.73,22129.69 30774.2,22129.69 30835.38,22068.51 U5.4
  Bottom Layer w15: U2.10 30511.51,21630.25 30569.22,21687.96 30569.22,22044.63 30525.31,22088.54 v1(30470.59,22088.54)
IN_EN_A2: C12.2 U3.2 U5.10 | length 994
  Top Layer w15: U5.10 31135.38,22018.8 31205.26,22088.68 31311.96,22088.68 31347.05,22053.59 v1(31726.25,22053.59)
  Bottom Layer w15: v1(31726.25,22053.59) 31671.28,21998.62 31671.28,21849.15 31682.58,21837.86 U3.2
IN_EN_A3: C10.2 U3.10 U5.8 | length 699.2
  Top Layer w15: U5.8 31035.38,21905.22 31059.43,21881.17 31191.97,21881.17 31301.31,21771.83 v1(31301.31,21688.26)
  Bottom Layer w15: v1(31301.31,21688.26) U3.10@31538.03,21688.26
IN_EN_B0: C7.2 U2.4 U5.5 | length 504.4
  Top Layer w20: v1@30885.38,21681.91 U5.5
  Bottom Layer w20: U2.4 30885.48,21680.25 v1(30886.26,21681.03)
IN_EN_B1: C5.2 U2.12 U5.3 | length 783.1
  Top Layer w15: v1(30470.59,21970.63) 30568.78,22068.81 30762.78,22068.81 30785.38,22046.21 U5.3
  Bottom Layer w15: U2.12 30505.61,21730.25 30524.39,21749.03 30524.39,21946.53 30500.29,21970.63 v1(30470.59,21970.63)
IN_EN_B2: C11.2 U3.4 U5.9 | length 1383.1
  Top Layer w15: U5.9 31085.38,22057.73 31208.8,22181.15 v1(31721.73,22181.15)
  Bottom Layer w15: v1(31721.73,22181.15) 31668.1,22181.15 31630.38,22143.44 31630.38,21779.71 31672.24,21737.86 U3.4
IN_EN_B3: C9.2 U3.12 U5.7 | length 701.7
  Top Layer w15: U5.7 30985.38,21879.47 31017.79,21847.06 31145.79,21847.06 31158.54,21834.31 v1(31158.54,21787.66)
  Bottom Layer w15: v1(31158.54,21787.66) U3.12@31538.24,21787.66
NetD1_1: D1.1 R1.1 | length 142.6
  Top Layer w15: D1.1 28253.45,21890.57 R1.1
NetD2_1: D2.1 R5.1 | length 121.6
  Top Layer w20: R5.1 28268.05,22301.19 D2.1
NetD3_1: D3.1 R7.2 | length 195.9
  Top Layer w20: D3.1 30941.02,25379.72 R7.2
NetD4_1: D4.1 R8.2 | length 193.5
  Top Layer w20: D4.1 30650.06,25470.05 R8.2
NetD5_1: D5.1 R9.1 | length 125.7
  Top Layer w15: D5.1 28259.6,22827.4 R9.1
NetD6_1: D6.1 R13.1 | length 117.1
  Top Layer w20: R13.1 28251.16,23212.7 D6.1
NetD7_1: D7.1 R16.1 | length 120.9
  Top Layer w20: R16.1 28243.22,23547.56 D7.1
NetD8_1: D8.1 R17.1 | length 123.2
  Top Layer w20: R17.1@28253.5,23942.66 D8.1
NetD9_1: D9.1 R20.1 | length 121.9
  Top Layer w20: R20.1 28739.6,24966.46 D9.1
NRST: C13.1 R15.2 S1.2 U1.6 | length 1092.8
  Top Layer w15: C13.1 29503.69,24186.56 29507.73,24182.52 S1.2 ; R15.2 29511.77,24256.12 29531.22,24275.57 29894.41,24275.57 29995.27,24174.72 U1.6
O_IN_0: H1.3 R1.2 RN2.2 U6.10 | length 2171.6
  Top Layer w20: H1.3 27926.31,21860.17 28098.66,22032.52 R1.2 28371.09,22240.16 28371.09,22526.3 28507.3,22662.51 28507.3,22849.8 28574.27,22916.77 RN2.2 28868.04,22916.77 29100.56,23149.29 U6.10
O_IN_1: H2.3 R5.2 RN2.3 U6.9 | length 1891.4
  Top Layer w20: H2.3 27948.59,22272.35 28098.89,22422.66 R5.2 28178.05,22472.21 28422.17,22716.33 28422.17,22917.91 28521.03,23016.77 RN2.3 28873.69,23016.77 29056.21,23199.29 U6.9
O_IN_2: H3.3 R9.2 RN2.4 U6.8 | length 1597.3
  Top Layer w20: H3.3 28019.39,22677.19 R9.2 28458.98,23116.77 RN2.4 28860.44,23116.77 28992.96,23249.29 U6.8
O_IN_3: H5.3 R13.2 RN2.5 U6.7 | length 1525.3
  Top Layer w15: H5.3 27951.25,23081.29 28084.34,23214.39 R13.2 28252.07,23306.98 28422.98,23306.98 28513.2,23216.77 RN2.5 28886.43,23216.77 28968.95,23299.29 U6.7
O_IN_4: H8.3 R16.2 RN2.6 U6.6 | length 1512.3
  Top Layer w15: H8.3 27999.23,23492.46 28049.7,23542.94 R16.2 28148.6,23502.03 28197.03,23453.6 28455.44,23453.6 28592.27,23316.77 RN2.6 28898.97,23316.77 28931.49,23349.29 U6.6
O_IN_5: H10.3 R17.2 RN2.7 U6.5 | length 1603
  Top Layer w15: H10.3 28033.47,23893.84 28079.13,23939.51 R17.2 28683.09,23416.77 RN2.7 28904.82,23416.77 28922.29,23399.29 U6.5
O_IN_6: HD6.1 R20.2 RN2.8 U6.4 | length 2483.5
  Top Layer w15: HD6.1 28555.53,25109.95 28529.19,25083.6 R20.2 28532.26,24966.46 28532.26,23717.75 RN2.8 28936.81,23516.77 29004.29,23449.29 U6.4
O_IN_7: RN2.9 U6.3 | length 592.6
  Top Layer w15: RN2.9 28938.97,23616.77 29056.45,23499.29 U6.3
P17: RN1.3 U1.26 U4.20 | length 1625.6
  Top Layer w10: 30081.25,22826.98 30194.16,22826.98
  Top Layer w15: U4.20 28929.26,22429.46 28929.26,22571.48 28940.23,22582.45 RN1.3 29114.48,22826.98 30081.25,22826.98 ; 30194.16,22826.98 30234.84,22867.66 U1.26
P19: RN1.5 U1.25 U4.18 | length 1417.3
  Top Layer w10: 30093.57,22728 30184.91,22728
  Top Layer w15: U4.18 29034.3,22536.24 29140.23,22642.18 RN1.5 29215.5,22728 30093.57,22728 ; 30184.91,22728 30231.63,22774.72 U1.25
P21: RN1.7 U1.24 U4.16 | length 1361.2
  Top Layer w15: U4.16 29134.3,22484.36 29225.29,22575.35 29307.52,22575.35 29340.23,22608.06 RN1.7
  Bottom Layer w10: 30094.44,22627.53 30201.05,22627.53
  Bottom Layer w15: RN1.7 29340.23,22659.77 29409.11,22728.65 29964.38,22728.65 30065.5,22627.53 30094.44,22627.53 ; 30201.05,22627.53 30234.84,22661.32 U1.24
P33: RN1.9 U1.23 U4.14 | length 1286
  Top Layer w15: U4.14 29234.3,22468.27 29261.08,22495.06 29382.56,22495.06 RN1.9 29826.98,22652.73 30019.01,22460.7 30186.4,22460.7 30234.84,22509.15 U1.23
P35: U1.67
P36: U1.66
P38: U1.68
P40: U1.65
P41: U1.69
P42: U1.64
P47: U1.70
P48: U1.63
PA0: U1.38
PA1: U1.8
PA2: PWM.1 U1.37 | length 2589.7
  Bottom Layer w10: 30086.26,23925.31 30190.97,23925.31
  Bottom Layer w15: U1.37@30234.84,23969.19 U1.37
  Bottom Layer w20: PWM.1 29179.61,24533.22 29787.52,23925.31 30086.26,23925.31 ; 30190.97,23930.84 U1.37
PA3: U1.9
PA4: U1.36
PA5: U1.10
PA6: U1.35
PA7: U1.11
PA8: U1.83
PA9: U1.49
PA10: U1.84
PA11: U1.48
PA12: U1.85
PA15: U1.47
PB0: U1.33
PB1: U1.13
PB2: U1.32
PB3: U1.2
PB4: U1.43
PB5: U1.3
PB6: U1.42
PB10: H12.2 U1.55 | length 521.4
  Bottom Layer w10: U1.55 31534.84,23675.74 31586.08,23726.97 31736.27,23726.97
  Bottom Layer w20: 31736.27,23726.97 31772.36,23763.06 H12.2
PB11: H12.1 U1.78 | length 396.8
  Top Layer w20: H12.1@32046.34,23646.68 H12.1@32051.78,23641.24
  Bottom Layer w20: U1.78 31646.5,23663.06 H12.1
PB12: U1.54
PB13: U1.79
PB14: U1.53
PB15: U1.80
PC3: U1.39
PC4: U1.34
PC6: U1.81
PC7: U1.51
PC8: U1.82
PC9: U1.50
PC10: U1.86
PC11: U1.46
PC12: U1.87
PD0: U1.56
PD1: U1.77
PD2: U1.57
PD3: U1.76
PE0: U1.5
PE1: U1.40
pads on no net: Dr1.1 Dr2.1 Dr3.1 Dr4.1 U1.12 U1.52 U2.5 U2.6 U2.8 U2.9 U3.5 U3.6 U3.8 U3.9 U6.21
copper on no net:
  other v1: 31156.63,21607.52

## Polygon pours and split planes (outlines as drawn)
GND on Top Layer "Top Layer-No Net" (solid, remove dead copper, pour order 2): 27693.05,25630.46 32290.24,25630.46 32445.42,25475.28 32426.02,25455.88 32426.02,20800.5 27777.11,20800.5 27621.93,20955.68
GND on Bottom Layer "Top Layer-No Net" (solid, remove dead copper, pour order 4): 27667.18,25668.6 32261.78,25668.6 32404.03,25526.35 32389.8,25512.13 32389.8,20775.28 27837.88,20775.28 27667.18,20945.98

## Keep-outs
Keep-Out Layer:
  lines w10: 27823.52,25536.71 32226.99,25536.71 32242.59,25521.11 32242.59,20943.47 27813.48,20943.47 27813.48,25526.68 27822.93,25536.13 27825.28,25536.13

## Silkscreen, mask and mechanical layers (free items; w line width, h text height)
Top Overlay:
  text "470" at 30663.12,25435.41 h30 r90
  text "104" at 30341.79,25372.42 h60 r90
  text "IN7" at 28730.17,25127.18 h60 r180
  text "10u" at 30296.49,25117.08 h60 r90
  text "5V" at 31369.93,25049.01 h60
  text "104" at 31701.16,24903.58 h60
  text "4.7k" at 29836.5,24894.28 h60 r270
  text "104" at 29261.01,24874.81 h60 r270
  text "1k" at 28191.95,24153.61 h60
  text "IN6" at 28061.15,24071.23 h60 r270
  text "104" at 29287.13,24007.12 h60
  text "10k" at 29555.03,23999.73 h60
  text "IN5" at 28055.43,23676.24 h60 r270
  text "IN4" at 28071.47,23246.95 h60 r270
  text "74LCV4245" at 29482.05,23156.82 h50 r90
  text "IN3" at 28071.47,22837 h60 r270
  text "IN2" at 28071.47,22421.01 h60 r270
  text "74LCV4245" at 29170.94,22296.3 h50 r180
  text "IN1" at 28071.47,22003.5 h60 r270
  text "DIR0" at 29478.85,21773.22 h60 r90
  text "PUL0" at 29596.77,21770.47 h60 r90
  text "DIR3" at 28516.94,21767.41 h60 r90
  text "PUL3" at 28625.12,21760.55 h60 r90
  text "4.7k" at 31968.2,21672.26 h60
  text "B" at 30244.24,21499.32 h60
  text "A" at 30443.52,21499.32 h60
  text "B" at 30663.54,21499.32 h60
  text "A" at 30858.29,21499.32 h60
  text "B" at 31054.58,21499.32 h60
  text "A" at 31288.89,21499.32 h60
  text "B" at 31473.87,21499.32 h60
  text "A" at 31675.41,21499.32 h60
  text "DIR1" at 29470.62,21268.65 h60 r90
  text "DIR2" at 28524.56,21265.91 h60 r90
  text "PUL2" at 28634.25,21263.16 h60 r90
  text "PUL1" at 29585.8,21263.16 h60 r90
Bottom Overlay:
  text "102" at 30710.83,23723.06 h60
  text "102" at 31839.27,22234.48 h60